# Altium PCB PCB_L298_Board.PcbDoc
Units mm, origin at the board's own origin, x right, y up, seen from the top; angles counter-clockwise.
Board outline 74.93 x 56.52 mm, 2 copper layers (Top Layer, Bottom Layer); 96 components, 67 nets, 269 pads, 22 vias.
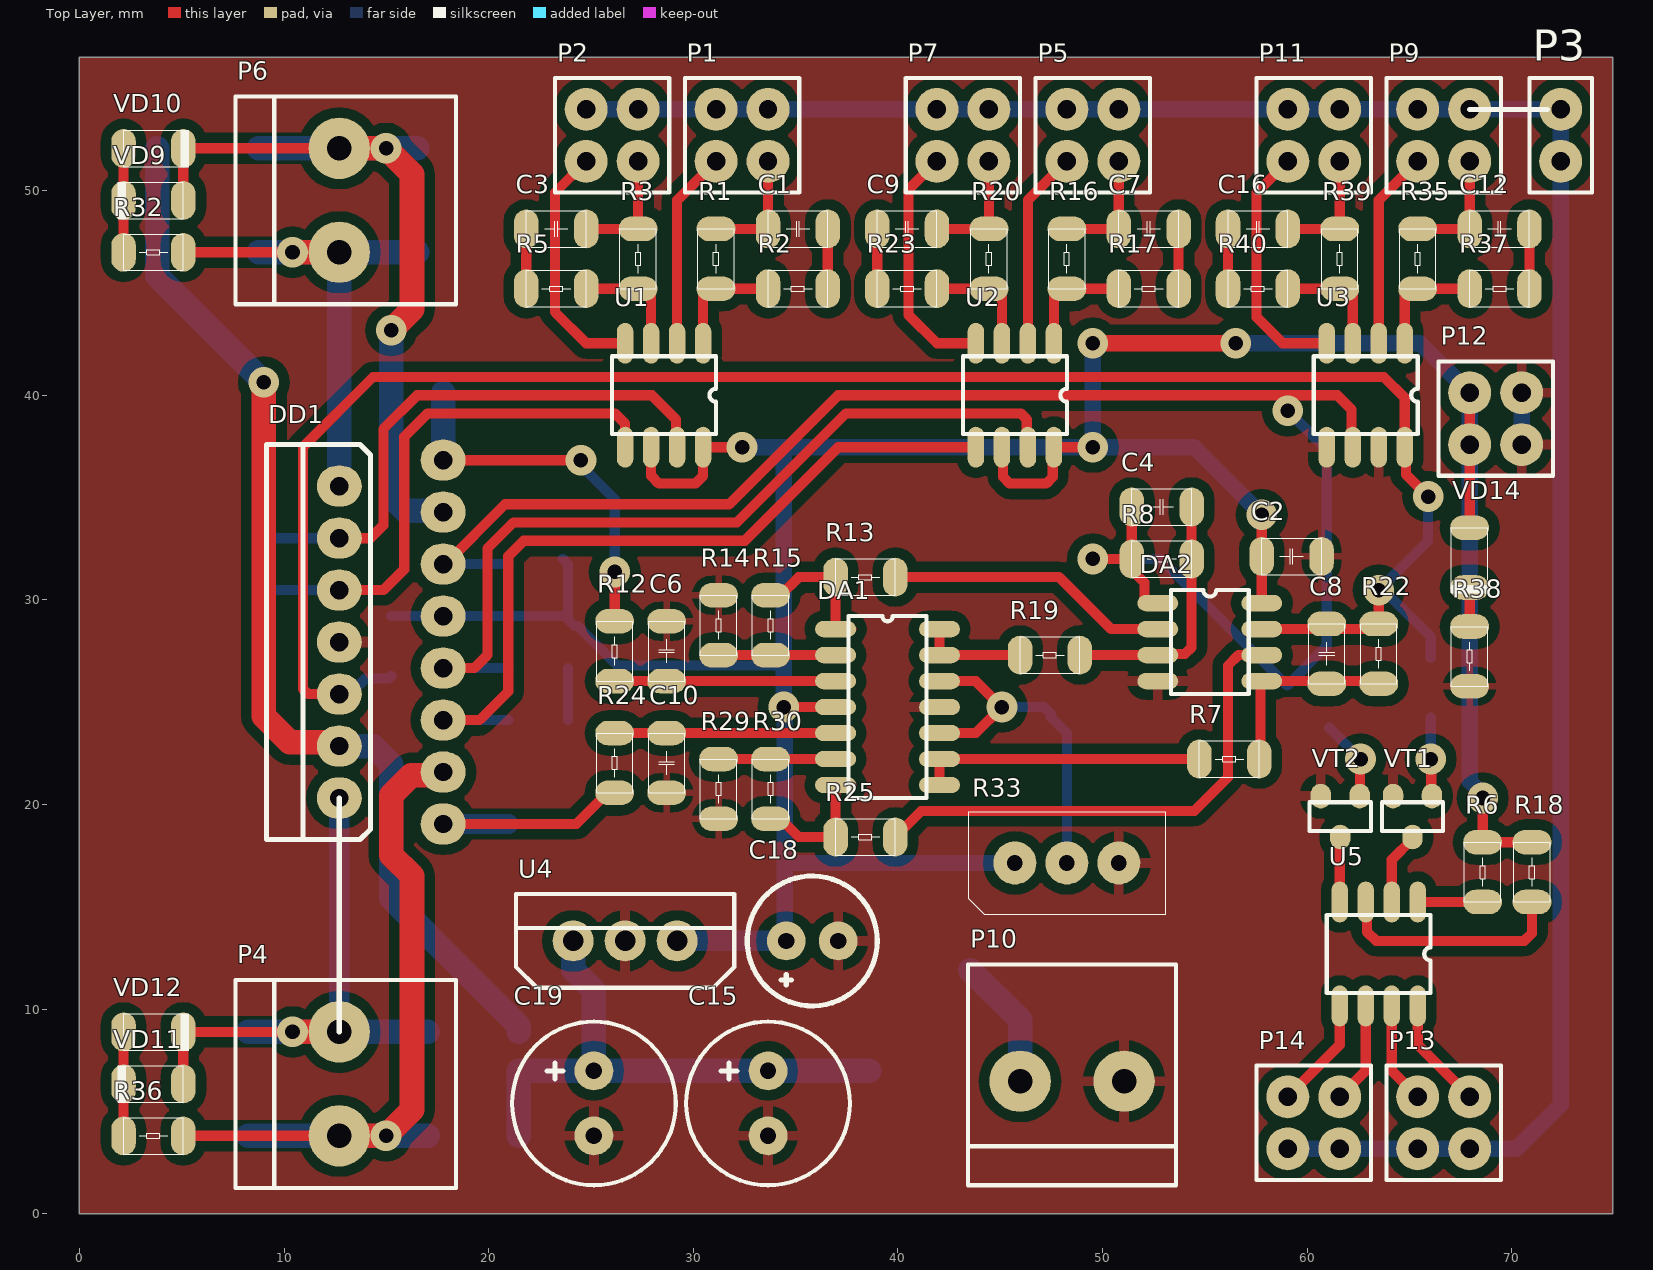
[diagram p0: Top Layer view]
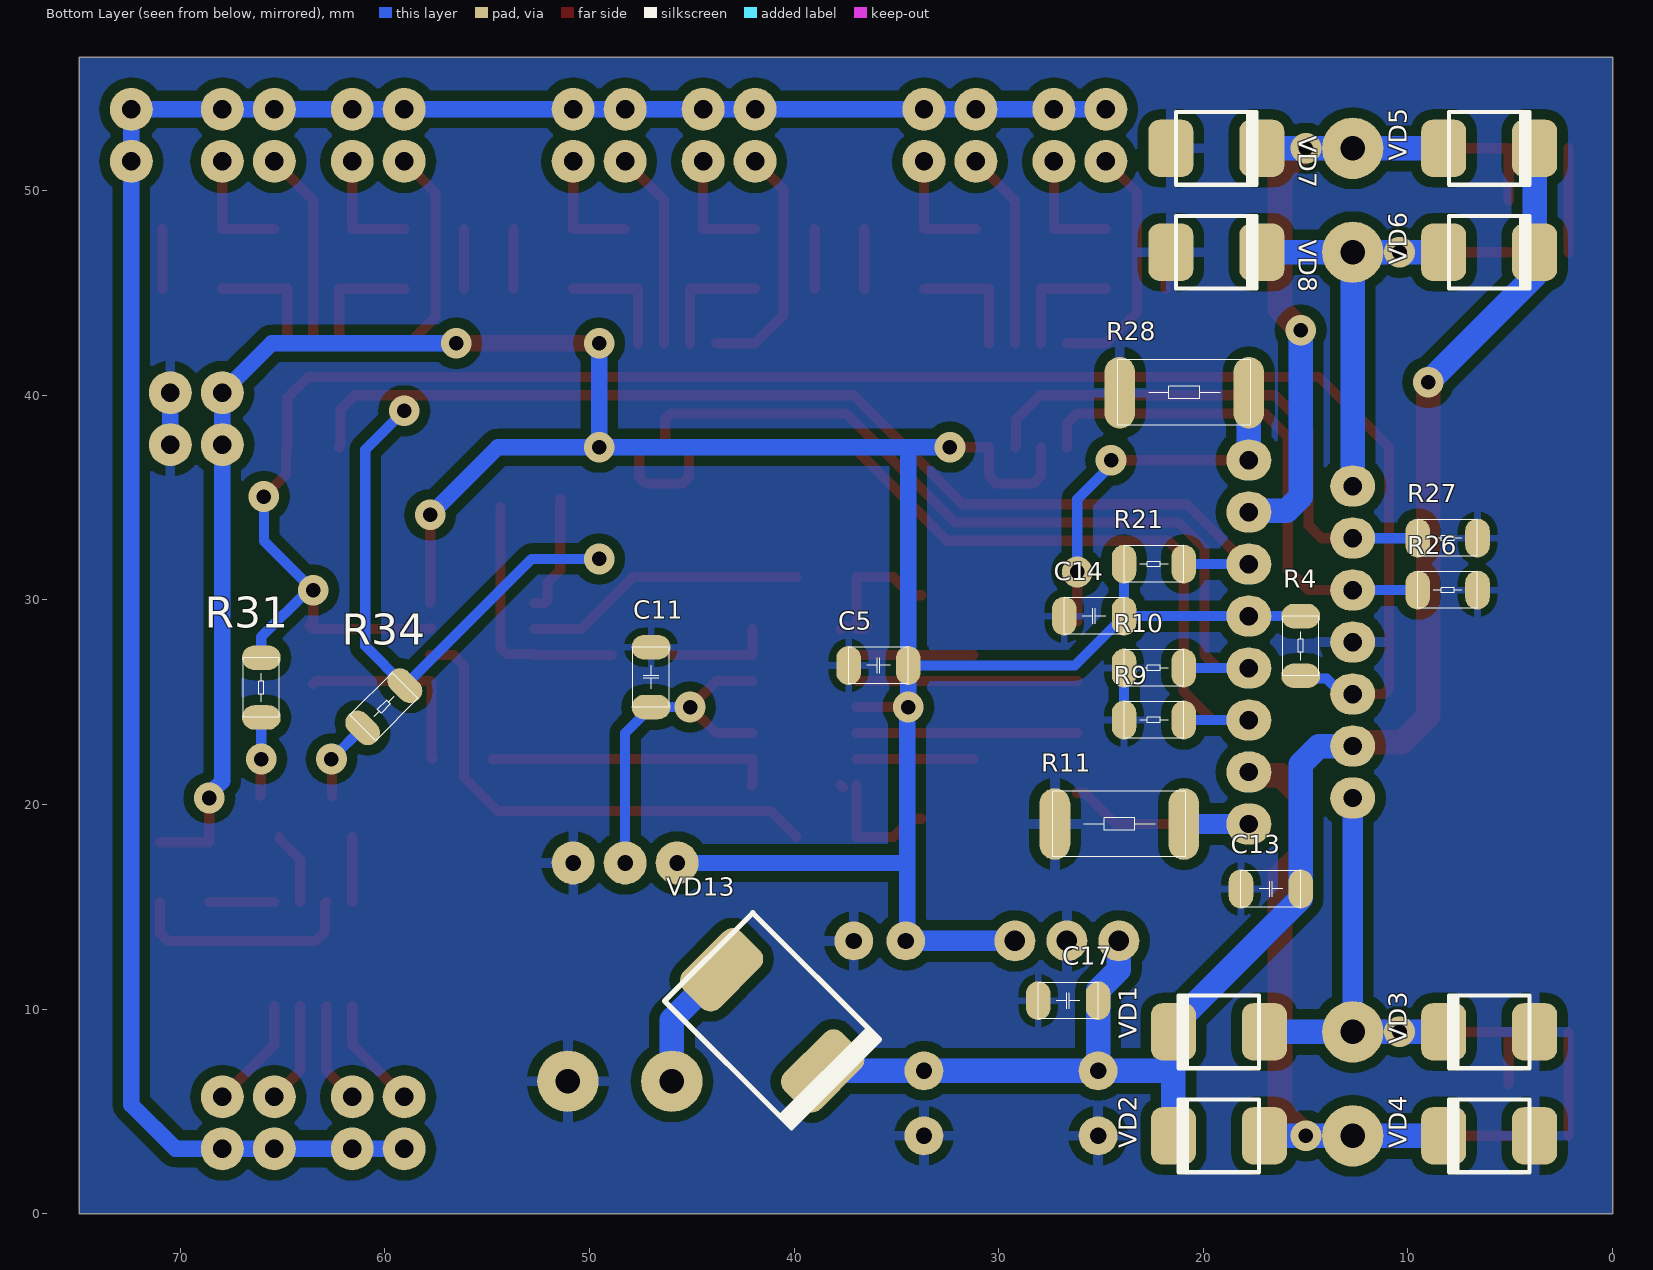
[diagram p1: Bottom Layer view, seen from below]

## Layer stack, top to bottom
Top Solder: solder mask 0.0102, Solder Resist, Dk 3.5
Top Layer: signal copper 0.0356
Dielectric 1: dielectric 0.32, FR-4, Dk 4.8
Bottom Layer: signal copper 0.0356
Bottom Solder: solder mask 0.0102, Solder Resist, Dk 3.5

## Board outline
0,0 74.93,0 74.93,56.515 0,56.515

## Design rules (kind name [scope] priority, off if disabled: settings)
Clearance [All] p1: gap=0.5 ignorepadtopadclearanceinfootprint=FALSE except(0: Arc-Hole Track-Hole SMDPad-Hole THPad-Hole Via-Hole Fill-Hole Poly-Hole Region-Hole Text-Hole; 0.25: Arc-Arc Arc-Track Arc-SMDPad Arc-THPad Arc-Via Track-Track Track-SMDPad Track-THPad Track-Via SMDPad-SMDPad SMDPad-THPad SMDPad-Via THPad-THPad THPad-Via Via-Via; 0.254: Arc-Text Track-Text SMDPad-Text THPad-Text Via-Text Fill-Text Poly-Text Region-Text Text-Text)
PlaneConnect [All] p1: planeconnectstyle=Relief reliefexpansion=0.5 reliefentries=4 reliefconductorwidth=0.5 reliefairgap=0.5
PolygonConnect PolygonConnect_1 [HasFootprint('SMD-1206')] p1: connectstyle=Relief reliefconductorwidth=0.35 reliefentries=4 polygonreliefangle="90 Angle" airgapwidth=0.35
PolygonConnect [All] p2: connectstyle=Relief reliefconductorwidth=0.5 reliefentries=4 polygonreliefangle="90 Angle" airgapwidth=0.5
RoutingVias [All] p1: holewidth=0.711 width=2 viastyle="Through Hole" minholewidth=0.711 minwidth=1.27 maxholewidth=0.711 maxwidth=1.5
SolderMaskExpansion [All] p1: expansion=0.102
Width [All] p1: maxlimit=3 minlimit=0.2 preferedwidth=0.5
29 further rules are at their usual default settings.

## Components (designator, comment, footprint, x,y, rotation, side; value= is the part's Value field where it differs from the comment)
C1 "Ceramic" SMD-1206 33.655,48.133 r0 top
C2 "Ceramic" SMD-1206 60.706,32.131 r180 top
C3 "Ceramic" SMD-1206 24.765,48.133 r180 top
C4 "Ceramic" SMD-1206 54.356,34.544 r180 top
C5 "Ceramic" SMD-1206 34.417,26.797 r0 bottom
C6 "Ceramic" SMD-1206 28.702,26.035 r90 top
C7 "Ceramic" SMD-1206 50.8,48.133 r0 top
C8 "Ceramic" SMD-1206 60.96,25.908 r90 top
C9 "Ceramic" SMD-1206 41.91,48.133 r180 top
C10 "Ceramic" SMD-1206 28.702,23.495 r270 top
C11 "Ceramic" SMD-1206 46.99,24.765 r90 bottom
C12 "Ceramic" SMD-1206 67.945,48.133 r0 top
C13 "Ceramic" SMD-1206 15.24,15.875 r0 bottom
C14 "Ceramic" SMD-1206 23.876,29.21 r0 bottom
C15 "Polar" BAR-(8-11)(3.175) 33.655,3.81 r90 top
C16 "Ceramic" SMD-1206 59.055,48.133 r180 top
C17 "Ceramic" SMD-1206 25.146,10.414 r0 bottom
C18 "Polar" BAR-(6.3-11)(2.54) 37.084,13.335 r180 top
C19 "Polar" BAR-(8-11)(3.175) 25.146,3.81 r90 top
DA1 "MCP6004" SOP-14 36.957,28.575 r0 top
DA2 "LM293" SOP-8 52.705,29.845 r0 top
DD1 "full-bridge driver" MULTIWATT-15 12.7,20.32 r0 top
P1 "C-2X2" C-2X2(2.54) 33.655,53.975 r180 top
P2 "C-2X2" C-2X2(2.54) 27.305,53.975 r180 top
P3 "C-2X1" C-2X1(2.54) 72.39,51.435 r90 top
P4 "C-2X1" CB2-10-11-X(5.08) 12.7,8.89 r270 top
P5 "C-2X2" C-2X2(2.54) 50.8,53.975 r180 top
P6 "C-2X1" CB2-10-11-X(5.08) 12.7,52.07 r270 top
P7 "C-2X2" C-2X2(2.54) 44.45,53.975 r180 top
P9 "C-2X2" C-2X2(2.54) 67.945,53.975 r180 top
P10 "C-2X1" CB2-10-11-X(5.08) 45.974,6.477 r0 top
P11 "C-2X2" C-2X2(2.54) 61.595,53.975 r180 top
P12 "C-2X2" C-2X2(2.54) 67.945,37.592 r0 top
P13 "C-2X2" C-2X2(2.54) 65.405,3.175 r0 top
P14 "C-2X2" C-2X2(2.54) 59.055,3.175 r0 top
R1 "Resistor" SMD-1206 31.115,45.212 r90 top value=10kOm
R2 "Resistor" SMD-1206 33.655,45.212 r0 top value=10kOm
R3 "Resistor" SMD-1206 27.305,45.212 r90 top value=10kOm
R4 "Resistor" SMD-1206 15.24,26.289 r90 bottom value=10kOm
R5 "Resistor" SMD-1206 24.765,45.212 r180 top value=10kOm
R6 "Resistor" SMD-1206 68.58,15.24 r90 top value=10kOm
R7 "Resistor" SMD-1206 57.658,22.225 r180 top value=10kOm
R8 "Resistor" SMD-1206 54.356,32.004 r180 top value=10kOm
R9 "Resistor" SMD-1206 23.876,24.13 r180 bottom value=10kOm
R10 "Resistor" SMD-1206 23.876,26.67 r180 bottom value=10kOm
R11 "Resistor" SMD-2512 27.255,19.05 r180 bottom value=10kOm
R12 "Resistor" SMD-1206 26.162,26.035 r90 top value=10kOm
R13 "Resistor" SMD-1206 39.878,31.115 r180 top value=10kOm
R14 "Resistor" SMD-1206 31.242,27.305 r90 top value=10kOm
R15 "Resistor" SMD-1206 33.782,30.226 r270 top value=10kOm
R16 "Resistor" SMD-1206 48.26,45.212 r90 top value=10kOm
R17 "Resistor" SMD-1206 50.8,45.212 r0 top value=10kOm
R18 "Resistor" SMD-1206 70.993,15.24 r90 top value=10kOm
R19 "Resistor" SMD-1206 48.895,27.305 r180 top value=10kOm
R20 "Resistor" SMD-1206 44.45,45.212 r90 top value=10kOm
R21 "Resistor" SMD-1206 20.955,31.75 r0 bottom value=10kOm
R22 "Resistor" SMD-1206 63.5,25.908 r90 top value=10kOm
R23 "Resistor" SMD-1206 41.91,45.212 r180 top value=10kOm
R24 "Resistor" SMD-1206 26.162,23.495 r270 top value=10kOm
R25 "Resistor" SMD-1206 39.878,18.415 r180 top value=10kOm
R26 "Resistor" SMD-1206 6.604,30.48 r0 bottom value=10kOm
R27 "Resistor" SMD-1206 6.604,33.02 r0 bottom value=10kOm
R28 "Resistor" SMD-2512 24.08,40.132 r180 bottom value=10kOm
R29 "Resistor" SMD-1206 31.242,22.225 r270 top value=10kOm
R30 "Resistor" SMD-1206 33.782,19.304 r90 top value=10kOm
R31 "Resistor" SMD-1206 66.04,24.257 r90 bottom value=10kOm
R32 "Resistor" SMD-1206 5.08,46.99 r180 top value=10kOm
R33 "Tuning" "3296(bot only)" 45.72,17.145 r0 top
R34 "Resistor" SMD-1206 61.087,23.749 r135 bottom value=10kOm
R35 "Resistor" SMD-1206 65.405,45.212 r90 top value=10kOm
R36 "Resistor" SMD-1206 5.08,3.81 r180 top value=10kOm
R37 "Resistor" SMD-1206 67.945,45.212 r0 top value=10kOm
R38 "Resistor" SMD-1206 67.945,25.781 r90 top value=10kOm
R39 "Resistor" SMD-1206 61.595,45.212 r90 top value=10kOm
R40 "Resistor" SMD-1206 59.055,45.212 r180 top value=10kOm
U1 "MOCD207/208" SOP-8 30.48,42.545 r270 top
U2 "MOCD207/208" SOP-8 47.625,42.545 r270 top
U3 "MOCD207/208" SOP-8 64.77,42.545 r270 top
U4 "L7800" TO-220(EX-1) 24.13,13.335 r0 top
U5 "MOCD207/208" SOP-8 65.405,15.24 r270 top
VD1 "SS16" SMB(DO-214AA) 17.018,8.89 r0 bottom
VD2 "SS16" SMB(DO-214AA) 17.018,3.81 r0 bottom
VD3 "SS16" SMB(DO-214AA) 3.81,8.89 r0 bottom
VD4 "SS16" SMB(DO-214AA) 3.81,3.81 r0 bottom
VD5 "SS16" SMB(DO-214AA) 8.255,52.07 r180 bottom
VD6 "SS16" SMB(DO-214AA) 8.255,46.99 r180 bottom
VD7 "SS16" SMB(DO-214AA) 21.59,52.07 r180 bottom
VD8 "SS16" SMB(DO-214AA) 21.59,46.99 r180 bottom
VD9 "Led" SMD-1206 5.08,49.53 r180 top
VD10 "Led" SMD-1206 2.159,52.07 r0 top
VD11 "Led" SMD-1206 5.08,6.35 r180 top
VD12 "Led" SMD-1206 2.159,8.89 r0 top
VD13 "STPS5L60" SMC(DO-214AB) 43.547,11.924 r225 bottom
VD14 "Led" SMD-1206 67.945,33.528 r270 top
VT1 "BC847" SOT-23 66.101,20.415 r180 top
VT2 "BC847" SOT-23 62.569,20.415 r180 top

## Footprints (in the part's own frame and the unit in brackets; to place one, negate y for a bottom-side part, rotate by r counter-clockwise, add the part's x,y. Pads: shape width x height; smd on the part's side, far side on the other; paste and mask are expansions set on the pad)
"3296(bot only)" [mm]
  round 2.1 hole 0.762: 1(0,0) 2(2.54,0) 3(5.08,0)
  silkscreen extent -2.25,-2.5 7.37,2.5
BAR-(6.3-11)(2.54) [mm]
  round 1.9 hole 0.8: 1(0,0) 2(2.54,0)
  silkscreen extent -1.91,-3.17 4.44,3.17
BAR-(8-11)(3.175) [mm]
  round 1.9 hole 0.8: 1(0,0) 2(3.175,0)
  silkscreen extent -2.41,-4 5.59,4
C-2X1(2.54) [mm]
  round 2.1 hole 0.9: 1(0,0) 2(2.54,0)
  silkscreen extent -1.52,-1.52 4.06,1.52
C-2X2(2.54) [mm]
  round 2.1 hole 0.9: 1(0,0) 2(0,2.54) 3(2.54,0) 4(2.54,2.54)
  silkscreen extent -1.52,-1.52 4.06,4.06
CB2-10-11-X(5.08) [mm]
  round 3 hole 1.2: 1(0,0) 2(5.08,0)
  silkscreen extent -2.54,-5.08 7.62,5.72
MULTIWATT-15 [mm]
  oval 2.2x2 hole 0.9: 1(5.08,-1.27) 2(0,0) 3(5.08,1.27) 4(0,2.54) 5(5.08,3.81) 6(0,5.08) 7(5.08,6.35) 8(0,7.62) 9(5.08,8.89) 10(0,10.16) 11(5.08,11.43) 12(0,12.7) 13(5.08,13.97) 14(0,15.24) 15(5.08,16.51)
  silkscreen extent -3.56,-2.03 1.52,17.27
SMB(DO-214AA) [mm]
  rrect50% 2.2x2.8 smd: 1(0,0) 2(4.445,0)
  silkscreen extent 0.25,-1.78 4.19,1.78
SMC(DO-214AB) [mm]
  rrect50% 2.5x4 smd: 1(0,0) 2(6.985,0)
  silkscreen extent -0.89,-3.05 7.87,3.05
SMD-1206 [mm]
  oval 1.2x1.9 smd: 1(0,0) 2(2.921,0)
  silkscreen extent 0,-0.89 2.92,0.89
SMD-2512 [mm]
  oval 1.5x3.5 smd: 1(0,0) 2(6.3,0)
  silkscreen extent -0.1,-1.6 6.4,1.6
SOP-8 [mm]
  oval 2x0.8 smd: 1(0,0) 2(0,-1.27) 3(0,-2.54) 4(0,-3.81) 5(5.08,-3.81) 6(5.08,-2.54) 7(5.08,-1.27) 8(5.08,0)
  silkscreen extent 0.64,-4.44 4.44,0.64
SOP-14 [mm]
  oval 2x0.8 smd: 1(0,0) 2(0,-1.27) 3(0,-2.54) 4(0,-3.81) 5(0,-5.08) 6(0,-6.35) 7(0,-7.62) 8(5.08,-7.62) 9(5.08,-6.35) 10(5.08,-5.08) 11(5.08,-3.81) 12(5.08,-2.54) 13(5.08,-1.27) 14(5.08,0)
  silkscreen extent 0.64,-8.25 4.44,0.64
SOT-23 [mm]
  oval 1x1.2 smd: 1(0,0) 2(1.9,0) 3(0.95,2)
  silkscreen extent -0.55,0.3 2.45,1.7
TO-220(EX-1) [mm]
  round 2 hole 1: 1(0,0) 2(2.54,0) 3(5.08,0)
  silkscreen extent -2.79,-2.29 7.87,2.29

## Part data
C1 C2 C3 C4 C5 C6 C7 C8 C9 C10 C11 C12 C13 C14 C16 C17: capacity=0.1µF
C15 C18 C19: capacity=100µF
DA1: "1 MHz, Low-Power Op Amp"
DA2: "Low Power Dual Voltage Comparators"
DD1: library part L298, "High voltage, high current dual full-bridge driver designed to accept standard TTL logic levels and drive / inductive loads such as relays, solenoids, DC and / stepping motors."
R33: Resistance=10kOm
U1 U2 U3 U5: "Dual-channel Phototransistor Small Outline Surface / Mount Optocouplers"
U4: "L7800 series of three-terminal positive regulators"
VD1 VD2 VD3 VD4 VD5 VD6 VD7 VD8: "SURFACE MOUNT SCHOTTKY BARRIER RECTIFIERS  / Reverse Voltage - 20 to 100 V  / Forward Current - 1 A"
VD9 VD10 VD11 VD12 VD14: "universal template"
VD13: "5 A - 60 V power Schottky rectifier"
VT1 VT2: "NPN Plastic-Encapsulate Transistors"

## Via types
v1: diameter 1.5, hole 0.711, Top Layer to Bottom Layer, 22 vias

## Nets (pads, with @x,y where several pads share a name; then routed paths per layer and width w, separated by ;. In a path a pad name is that pad's centre, name@x,y a point inside that pad or via, vN(x,y) a via of type N, cw(c..) or ccw(c..) an arc to the next point about the centre after c; other vN are vias at no path point)
+5V: C2.2 C5.1 C14.1 C18.2 DA1.4 DA2.8 DD1.9 P12.1 P12.2 R4.2 R6.2 R18.2 R21.2 R33.1 U1.6 U1.8 U2.6 U2.8 U4.3 VD14.1 | length 168.7
  Top Layer w0.5: U1.6 27.94,36.068 28.321,35.687 30.099,35.687 30.48,36.068 U1.8 v1(32.385,37.465) ; v1(34.417,24.765) DA1.4 ; U2.6 45.142,37.408 45.142,36.011 45.466,35.687 47.244,35.687 47.568,36.011 47.568,37.408 U2.8 v1(49.53,37.465) ; DA2.8 C2.2 v1@57.785,34.036 ; VD14.1 P12.1 P12.2 ; v1(68.58,20.32) R6.2 R18.2
  Top Layer w0.8: v1(49.53,42.545) v1(56.515,42.545)
  Bottom Layer w0.5: R4.2 DD1.9 C14.1 ; R21.2@23.622,32.004 R21.2 C14.1 ; C5.1 26.289,26.797 24.36,28.726 24.199,28.726 23.876,29.049 C14.1
  Bottom Layer w0.8: v1(32.385,37.465) 34.417,37.465 ; C18.2 34.48,13.399 34.48,17.145 ; R33.1@45.969,16.896 R33.1 34.48,17.145 ; v1(49.53,42.545) v1(49.53,37.465) ; v1(56.515,42.545) 65.532,42.545 P12.2 P12.1 67.945,21.144 68.499,20.59 v1@68.499,20.239 ; v1(57.785,34.163) 54.483,37.465 v1(49.53,37.465) ; 34.417,37.465 v1(49.53,37.465) ; 34.417,37.465 C5.1 v1(34.417,24.765) 34.48,24.701 34.48,17.145
  Bottom Layer w1: U4.3 C18.2
+24V: C13.1 C15.2 C17.1 C19.2 DD1.4 U4.1 VD1.2 VD2.2 VD5.2 VD6.2 VD13.2 | length 79.6
  Top Layer w1: DD1.4@12.509,23.051 DD1.4
  Top Layer w1.2: v1(9.017,40.64) 9.017,24.322 10.287,23.051 DD1.4@12.509,23.051
  Bottom Layer w1.2: VD5.2 VD6.2 3.81,45.847 v1(9.017,40.64) ; DD1.4 14.351,22.86 15.24,21.971 C13.1 15.24,15.413 21.463,9.19 VD1.2 ; VD2.2 21.463,6.985 C19.2 C17.1 25.146,10.922 24.13,11.938 U4.1 ; C19.2@25.4,6.985 C15.2 VD13.2
A1: DD1.2 P4.1 VD1.1 VD3.2 VD11.1 VD12.2 | length 30.4
  Top Layer w0.5: VD11.1 VD12.2 v1(10.414,8.89)
  Top Layer w1.2: v1(10.414,8.89) P4.1
  Bottom Layer w1: P4.1 DD1.2
  Bottom Layer w1.2: VD3.2 v1(10.414,8.89) P4.1 VD1.1
A2: DD1.3 P4.2 R36.1 VD2.1 VD4.2 | length 39.3
  Top Layer w0.5: R36.1 P4.2
  Top Layer w1.2: P4.2 v1(14.986,3.81) 16.256,5.08 16.256,16.51 15.24,17.526 15.24,20.447 16.23,21.437 17.627,21.437 DD1.3
  Bottom Layer w1.2: VD4.2 P4.2 v1(14.986,3.81) VD2.1
B1: DD1.13 P6.1 VD5.1 VD7.2 VD9.1 VD10.2 | length 41
  Top Layer w0.5: VD9.1 VD10.2 P6.1
  Top Layer w1.2: P6.1 v1(14.986,52.07) 16.256,50.8 16.256,44.196 v1(15.24,43.18)
  Bottom Layer w0.5: DD1.13@17.708,34.362 DD1.13
  Bottom Layer w1.2: VD5.1@8.763,52.07 P6.1 v1(14.986,52.07) VD7.2@16.51,52.07 ; v1(15.24,43.18) 15.24,35.052 15.93,34.362 DD1.13@17.708,34.362
B2: DD1.14 P6.2 R32.1 VD6.1 VD8.2 | length 27.2
  Top Layer w0.5: R32.1 v1(10.414,46.99) ; P6.2 P6.2@12.7,47.354
  Top Layer w1.2: v1(10.414,46.99) P6.2
  Bottom Layer w1.2: VD6.1@8.763,46.99 v1(10.414,46.99) P6.2 ; DD1.14 P6.2 ; VD8.2@16.51,46.99 P6.2
CurrentA: DD1.1 R11.2 R24.2 | length 12.2
  Top Layer w0.5: DD1.1 24.288,19.05 25.812,20.574 R24.2
  Bottom Layer w1: DD1.1 R11.2
CurrentB: DD1.15 R12.2 R28.2 | length 18.6
  Top Layer w0.5: DD1.15 v1(24.511,36.83) ; R12.2 v1(26.162,31.369)
  Bottom Layer w0.5: v1(24.511,36.83) 24.511,36.576 26.162,34.925 v1(26.162,31.369)
  Bottom Layer w1.2: DD1.15 R28.2
CurrentLimit: C11.1 DA1.10 DA1.12 R33.2 | length 17.3
  Top Layer w0.5: DA1.10 43.815,23.495 v1(45.085,24.765) 43.815,26.035 DA1.12
  Bottom Layer w0.5: v1(45.085,24.765) C11.1 47.151,24.765 47.474,24.442 47.474,24.281 48.26,23.495 R33.2
EnableA: C8.2 DA2.7 DD1.6 R4.1 R22.2 R31.2 U3.8 | length 95.6
  Top Layer w0.5: DD1.6 11.176,25.4 10.922,25.654 10.922,37.465 14.351,40.894 33.02,40.894 63.754,40.894 64.77,39.878 U3.8 64.827,37.408 64.827,36.138 v1(65.913,35.052) ; DA2.7@57.728,28.632 DA2.7 R22.2@63.5,28.575 ; v1(63.5,30.48) R22.2 R22.2@63.5,28.575 ; R22.2@63.691,28.765 R22.2@63.5,28.575
  Bottom Layer w0.5: DD1.6 13.206,25.4 13.961,26.155 15.106,26.155 R4.1 ; v1(65.913,35.052) 65.913,32.893 v1(63.5,30.48) 63.754,30.48 66.04,28.194 R31.2
EnableB: C4.2 DA2.1 DD1.11 R8.2 R21.1 R34.2 U3.6 | length 88.9
  Top Layer w0.5: DD1.11@17.68,31.75 DD1.11 17.88,31.75 20.801,34.671 31.75,34.671 37.084,40.005 59.055,40.005 ; v1(49.53,32.004) R8.2 ; C4.2@51.435,34.925 C4.2 R8.2 ; DA2.1 52.186,29.845 52.048,29.984 52.048,30.852 51.435,31.465 R8.2 ; v1(59.055,39.243) 59.055,40.005 ; U3.6 62.173,37.522 62.173,39.3 61.468,40.005 59.055,40.005
  Bottom Layer w0.5: DD1.11 R21.1 ; v1(49.53,32.004) 52.832,32.004 R34.2 60.96,27.753 60.96,37.338 v1(59.055,39.243)
GND: C2.1 C5.2 C6.2 C10.2 C11.2 C13.2 C14.2 C15.1 C17.2 C18.1 C19.1 DA1.11 DA2.4 DD1.8 P10.2 P12.3 P12.4 R9.1 R10.1 R11.1 R14.2 R26.1 R27.1 R28.1 R29.2 R33.3 R38.1 U3.5 U3.7 U4.2 VD3.1 VD4.1 VD7.1 VD8.1 VT1.2 VT2.2 | length 5.1
  Bottom Layer w0.5: R9.1 R10.1
  Bottom Layer w0.8: P12.3 P12.4
GND_EXT: P1.1 P1.3 P2.1 P2.3 P3.1 P3.2 P5.1 P5.3 P7.1 P7.3 P9.1 P9.3 P11.1 P11.3 P13.1 P13.3 P14.1 P14.3 | length 110.5
  Bottom Layer w0.8: P2.3 P2.1 P1.3 P1.1 P7.3 P7.1 P5.3 P5.1 P11.3 P11.1 P9.3 P9.1 P3.2 P3.1 72.39,5.334 70.231,3.175 P13.3 P13.1 P14.3 P14.1
NetC1_1: C1.1 P1.2 R1.2 | length 6
  Top Layer w0.5: R1.2 C1.1 33.655,50.038 P1.2@33.655,51.562
NetC1_2: C1.2 R2.2 | length 2.9
  Top Layer w0.5: R2.2 C1.2
NetC3_1: C3.1 P2.2 R3.2 | length 5.8
  Top Layer w0.5: C3.1 R3.2 P2.2
NetC3_2: C3.2 R5.2 | length 2.9
  Top Layer w0.5: R5.2 C3.2
NetC4_1: C4.1 DA2.3 R8.1 R19.1 | length 12.5
  Top Layer w0.5: R19.1 DA2.3 52.762,27.362 54.032,27.362 54.356,27.686 R8.1 C4.1
NetC6_1: C6.1 DA1.3 R12.1 | length 10.8
  Top Layer w0.5: R12.1 C6.1 DA1.3
NetC7_1: C7.1 P5.2 R16.2 | length 5.8
  Top Layer w0.5: R16.2 C7.1 P5.2
NetC7_2: C7.2 R17.2 | length 2.9
  Top Layer w0.5: R17.2 C7.2
NetC8_1: C8.1 DA2.5 R7.1 R22.1 | length 9.6
  Top Layer w0.5: R7.1 57.721,22.288 57.721,25.971 DA2.5 63.373,26.035 R22.1
NetC9_1: C9.1 P7.2 R20.2 | length 5.8
  Top Layer w0.5: C9.1 R20.2 P7.2
NetC9_2: C9.2 R23.2 | length 2.9
  Top Layer w0.5: R23.2 C9.2
NetC10_1: C10.1 DA1.5 R24.1 | length 10.8
  Top Layer w0.5: R24.1 C10.1 DA1.5
NetC12_1: C12.1 P9.2 R35.2 | length 5.8
  Top Layer w0.5: R35.2 C12.1 P9.2
NetC12_2: C12.2 R37.2 | length 2.9
  Top Layer w0.5: R37.2 C12.2
NetC16_1: C16.1 P11.2 R39.2 | length 5.8
  Top Layer w0.5: C16.1 R39.2 P11.2
NetC16_2: C16.2 R40.2 | length 2.9
  Top Layer w0.5: R40.2 C16.2
NetDA1_1: DA1.1 R13.2 R15.1 | length 7
  Top Layer w0.5: R15.1 34.263,30.226 35.152,31.115 R13.2 DA1.1 36.583,28.575 DA1.1@36.445,28.714 ; DA1.1@37.465,28.714 37.477,28.702 37.592,28.702 DA1.1@37.719,28.575
NetDA1_2: DA1.2 R14.1 R15.2 | length 5.7
  Top Layer w0.5: R14.1 R15.2 DA1.2
NetDA1_6: DA1.6 R29.1 R30.2 | length 5.7
  Top Layer w0.5: R29.1 R30.2 DA1.6
NetDA1_7: DA1.7 R25.2 R30.1 | length 6.3
  Top Layer w0.5: R30.1 34.263,19.304 35.152,18.415 R25.2 DA1.7 ; DA1.7@37.592,20.828 DA1.7@37.719,20.955
NetDA1_8: DA1.8 DA1.9 R7.2 | length 14
  Top Layer w0.5: DA1.8@42.081,20.911 DA1.8 DA1.9 R7.2
NetDA1_13: DA1.13 DA1.14 R19.2 | length 5.2
  Top Layer w0.5: DA1.14 DA1.13 R19.2
NetDA2_2: DA2.2 R13.1 | length 13.9
  Top Layer w0.5: R13.1 47.879,31.115 50.419,28.575 DA2.2
NetDA2_6: DA2.6 R25.1 | length 24.8
  Top Layer w0.5: R25.1 41.148,19.685 54.483,19.685 56.134,21.336 56.134,26.797 56.642,27.305 DA2.6
NetDD1_5: DD1.5 R9.2 U2.5 | length 38.6
  Top Layer w0.5: DD1.5 19.558,24.13 20.955,25.527 20.955,32.131 21.717,32.893 32.512,32.893 37.084,37.465 U2.5
  Bottom Layer w0.5: DD1.5 R9.2
NetDD1_7: DD1.7 R10.2 U2.7 | length 41.4
  Top Layer w0.5: DD1.7 19.304,26.67 19.939,27.305 19.939,32.512 21.209,33.782 32.131,33.782 37.465,39.116 46.005,39.116 46.298,38.823 46.298,37.522 U2.7
  Bottom Layer w0.5: DD1.7 R10.2
NetDD1_10: DD1.10 R26.2 U1.5 | length 25.9
  Top Layer w0.5: DD1.10 14.859,30.48 15.875,31.496 15.875,37.973 17.018,39.116 26.162,39.116 26.67,38.608 U1.5
  Bottom Layer w0.5: R26.2 DD1.10
NetDD1_12: DD1.12 R27.2 U1.7 | length 27.1
  Top Layer w0.5: DD1.12 14.224,33.02 14.859,33.655 14.859,38.354 16.51,40.005 27.971,40.005 29.153,38.823 29.153,37.522 U1.7
  Bottom Layer w0.5: R27.2 DD1.12
NetP1_4: P1.4 U1.2 | length 9.7
  Top Layer w0.5: U1.2 29.21,49.53 P1.4
NetP2_4: P2.4 U1.4 | length 12.1
  Top Layer w0.5: P2.4 23.241,49.911 23.241,44.069 24.765,42.545 U1.4
NetP5_4: P5.4 U2.2 | length 9.7
  Top Layer w0.5: U2.2 46.355,49.53 P5.4
NetP7_4: P7.4 U2.4 | length 12
  Top Layer w0.5: P7.4 40.513,50.038 40.513,43.942 41.91,42.545 U2.4
NetP9_4: P9.4 U3.2 | length 9.7
  Top Layer w0.5: U3.2 63.5,49.53 P9.4
NetP10_1: P10.1 VD13.1 | length 6.5
  Bottom Layer w1: VD13.1@43.547,11.904 VD13.1
  Bottom Layer w1.2: VD13.1@43.547,11.904 45.974,9.477 P10.1
NetP11_4: P11.4 U3.4 | length 12.2
  Top Layer w0.5: P11.4 57.531,49.911 57.531,43.815 58.801,42.545 U3.4
NetP13_2: P13.2 U5.7 | length 5
  Top Layer w0.5: U5.7 64.135,6.991 65.405,5.721 P13.2
NetP13_4: P13.4 U5.8 | length 5.5
  Top Layer w0.5: U5.8 65.405,8.255 P13.4
NetP14_2: P14.2 U5.5 | length 5.5
  Top Layer w0.5: P14.2 61.595,8.255 U5.5
NetP14_4: P14.4 U5.6 | length 5
  Top Layer w0.5: P14.4 61.595,5.721 62.865,6.991 U5.6
NetR1_1: R1.1 R2.1 U1.1 | length 5.8
  Top Layer w0.5: U1.1 30.48,45.212 R1.1 R2.1
NetR3_1: R3.1 R5.1 U1.3 | length 5.8
  Top Layer w0.5: R5.1 R3.1 27.94,45.212 U1.3
NetR6_1: R6.1 U5.1 | length 3.2
  Top Layer w0.5: U5.1 R6.1
NetR16_1: R16.1 R17.1 U2.1 | length 5.8
  Top Layer w0.5: U2.1 47.625,45.212 R16.1 R17.1
NetR18_1: R18.1 U5.3 | length 11.4
  Top Layer w0.5: U5.3 62.922,15.183 62.922,13.786 63.373,13.335 70.612,13.335 70.993,13.716 R18.1
NetR20_1: R20.1 R23.1 U2.3 | length 5.8
  Top Layer w0.5: R23.1 R20.1 45.085,45.212 U2.3
NetR31_1: R31.1 VT1.1 | length 3.9
  Top Layer w0.5: v1(66.04,22.225) 66.071,22.194 66.071,20.446 VT1.1
  Bottom Layer w0.5: v1(66.04,22.225) R31.1
NetR32_2: R32.2 VD9.2 VD10.1 | length 5.1
  Top Layer w0.5: R32.2 VD9.2 VD10.1
NetR34_1: R34.1 VT2.1 | length 4
  Top Layer w0.5: VT2.1 62.59,20.436 62.59,22.204 v1(62.611,22.225)
  Bottom Layer w0.5: R34.1 v1(62.611,22.225)
NetR35_1: R35.1 R37.1 U3.1 | length 5.8
  Top Layer w0.5: U3.1 64.77,45.212 R35.1 R37.1
NetR36_2: R36.2 VD11.2 VD12.1 | length 5.1
  Top Layer w0.5: R36.2 VD11.2 VD12.1
NetR38_2: R38.2 VD14.2 | length 1.9
  Top Layer w0.5: R38.2 VD14.2
NetR39_1: R39.1 R40.1 U3.3 | length 5.8
  Top Layer w0.5: R40.1 R39.1 62.23,45.212 U3.3
NetU5_2: U5.2 VT1.3 | length 3.6
  Top Layer w0.5: U5.2 64.135,17.299 65.151,18.315 VT1.3
NetU5_4: U5.4 VT2.3 | length 3.2
  Top Layer w0.5: U5.4 VT2.3@61.595,18.415

## Polygon pours and split planes (outlines as drawn)
GND on Top Layer "Top Layer-GND" (solid, remove dead copper, pour order 6): 0,56.515 74.93,56.515 74.93,0 0,0
GND on Bottom Layer "Bottom Layer-GND" (solid, remove dead copper, pour order 8): 0,56.515 74.93,56.515 74.93,0 0,0

## Silkscreen, mask and mechanical layers (free items; w line width, h text height)
Top Overlay:
  lines w0.254: 12.7,8.89 12.7,20.32 ; 67.945,53.975 71.755,53.975